# Altium PCB PCB_Adapt_Board_SiPM.PcbDoc
Units mm, origin at the board's own origin, x right, y up, seen from the top; angles counter-clockwise.
Board outline 4.85 x 5.85 mm, 2 copper layers (Top Layer, Bottom Layer); 2 components, 4 nets, 22 pads, 0 vias.
Unrouted connection lines stored in the file: 8.
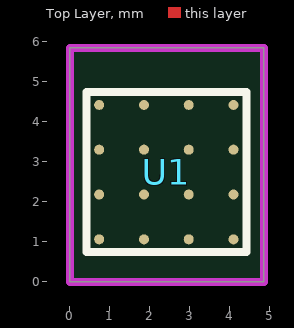
[diagram p0: Top Layer view]
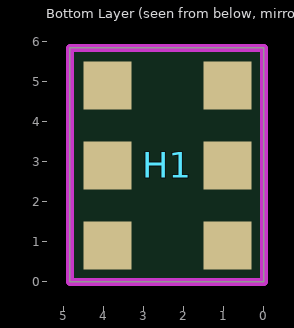
[diagram p1: Bottom Layer view, seen from below]

## Layer stack, top to bottom
Top Solder: solder mask 0.0102, Solder Resist, Dk 3.5
Top Layer: signal copper 0.0356
Dielectric 1: dielectric 0.32, FR-4, Dk 4.8
Bottom Layer: signal copper 0.0356
Bottom Solder: solder mask 0.0102, Solder Resist, Dk 3.5

## Board outline
0,0 0,5.85 4.85,5.85 4.85,0

## Design rules (kind name [scope] priority, off if disabled: settings)
Clearance [All] p1: gap=0.203 ignorepadtopadclearanceinfootprint=FALSE
PolygonConnect [All] p1: connectstyle=Relief reliefconductorwidth=0.254 reliefentries=4 polygonreliefangle="90 Angle" airgapwidth=0.254
RoutingVias [All] p1: holewidth=0.711 width=1.27 viastyle="Through Hole" minholewidth=0.711 minwidth=1.27 maxholewidth=0.711 maxwidth=1.27
SolderMaskExpansion [All] p1: expansion=0.102 istentingtop=FALSE
SupplyNets "Schematic Supply Nets" [InNet('GND')] p1: voltage=0.000
Width [All] p1: maxlimit=0.254 minlimit=0.254 preferedwidth=0.254
30 further rules are at their usual default settings.

## Components (designator, comment, footprint, x,y, rotation, side; value= is the part's Value field where it differs from the comment)
H1 "adapter" PCBComponent_1 2.414,2.914 r0 top
U1 "MICROFJ-40035-TSV-TR1" MICROFJ40035TSVTR1 2.413,2.743 r0 top

## Footprints (in the part's own frame and the unit in brackets; to place one, negate y for a bottom-side part, rotate by r counter-clockwise, add the part's x,y. Pads: shape width x height; smd on the part's side, far side on the other; paste and mask are expansions set on the pad)
MICROFJ40035TSVTR1 [mm]
  round 0.25 smd: A1(-1.68,1.68) A2(-0.56,1.68) A3(0.56,1.68) A4(1.68,1.68) B1(-1.68,0.56) B2(-0.56,0.56) B3(0.56,0.56) B4(1.68,0.56) C1(-1.68,-0.56) C2(-0.56,-0.56) C3(0.56,-0.56) C4(1.68,-0.56) D1(-1.68,-1.68) D2(-0.56,-1.68) D3(0.56,-1.68) D4(1.68,-1.68)
  silkscreen extent -2,-2 2,2
PCBComponent_1 [mm]
  rect 1.2x1.2 smd far side: 1(-1.5,2) 2(-1.5,0) 3(-1.5,-2) 4(1.5,-2) 5(1.5,0) 6(1.5,2)

## Part data
U1: "Photodiode 420nm 110ps - 14-WBGA", Manufacturer_Name=onsemi, Mouser Part Number=863-MFJ40035TSVTR1, Arrow Part Number=MICROFJ-40035-TSV-TR1, Arrow Price/Stock=https://www.arrow.com/en/products/microfj-40035-tsv-tr1/on-semiconductor?region=nac, Datasheet Link=https://www.onsemi.com/pdf/datasheet/microj-series-d.pdf, Geometry.Height=0.67mm, Manufacturer_Part_Number=MICROFJ-40035-TSV-TR1, Mouser Price/Stock=https://www.mouser.co.uk/ProductDetail/onsemi/MICROFJ-40035-TSV-TR1?qs=byeeYqUIh0Ol5PDp78G1mg%3D%3D

## Nets (pads, with @x,y where several pads share a name; then routed paths per layer and width w, separated by ;. In a path a pad name is that pad's centre, name@x,y a point inside that pad or via, vN(x,y) a via of type N, cw(c..) or ccw(c..) an arc to the next point about the centre after c; other vN are vias at no path point)
GND: H1.3 H1.6
NetH1_1: H1.1 H1.4 U1.A1 U1.D4
NetH1_2: H1.2 U1.B1 U1.C1
NetH1_5: H1.5 U1.B4 U1.C4
pads on no net: U1.A2 U1.A3 U1.A4 U1.B2 U1.B3 U1.C2 U1.C3 U1.D1 U1.D2 U1.D3

## Keep-outs
Keep-Out Layer:
  the board outline again, w0.203

## Dimensions
5.385,0 to 5.639,5.842 on Top Layer
0,-0.483 to 4.851,-0.508 on Top Layer